# Altium PCB ArduinoShield.PcbDoc
Units mil, origin at the board's own origin, x right, y up, seen from the top; angles counter-clockwise.
Board outline 2698.82 x 2101.51 mil, 2 copper layers (Top Layer, Bottom Layer), stack 65.792 mil thick; 29 components, 14 nets, 102 pads, 5 vias.
Unrouted connection lines stored in the file: 11.
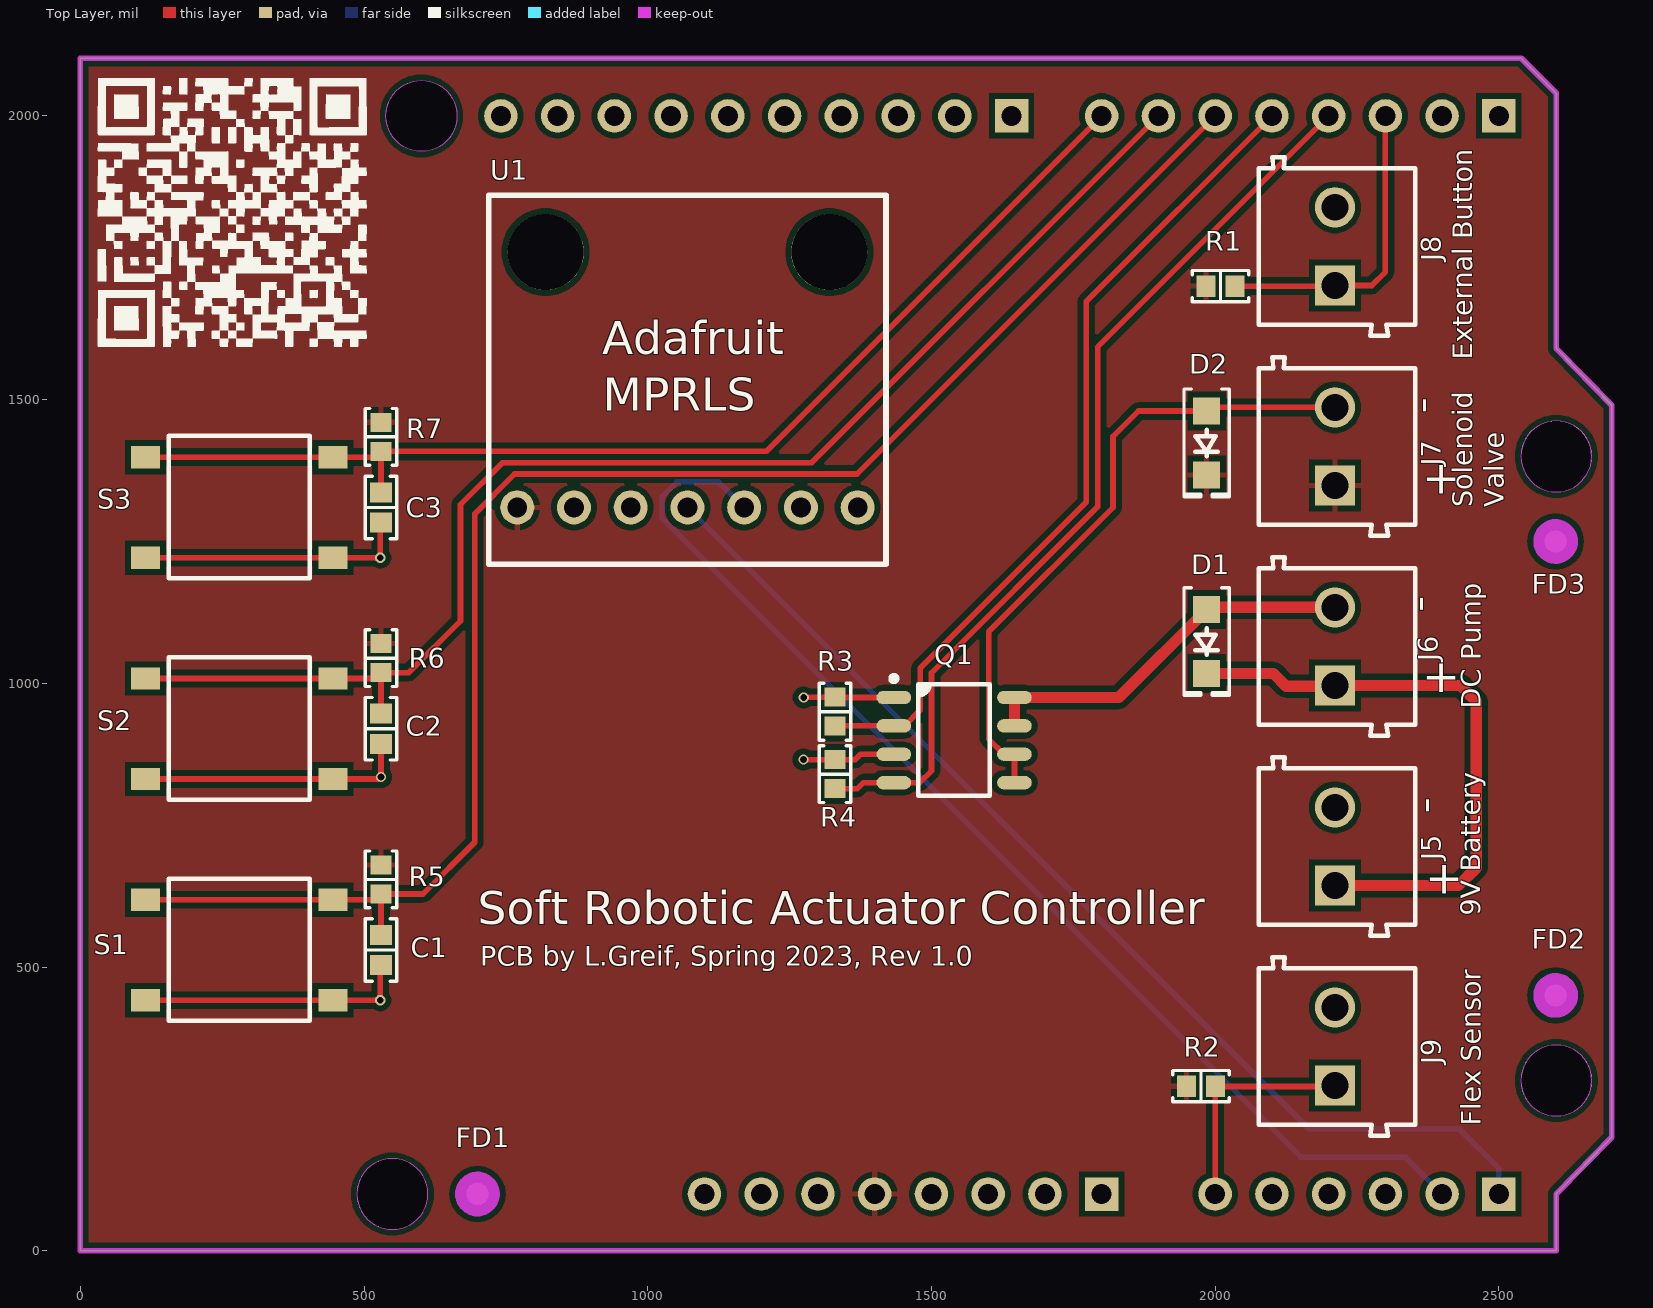
[diagram p0: Top Layer view]
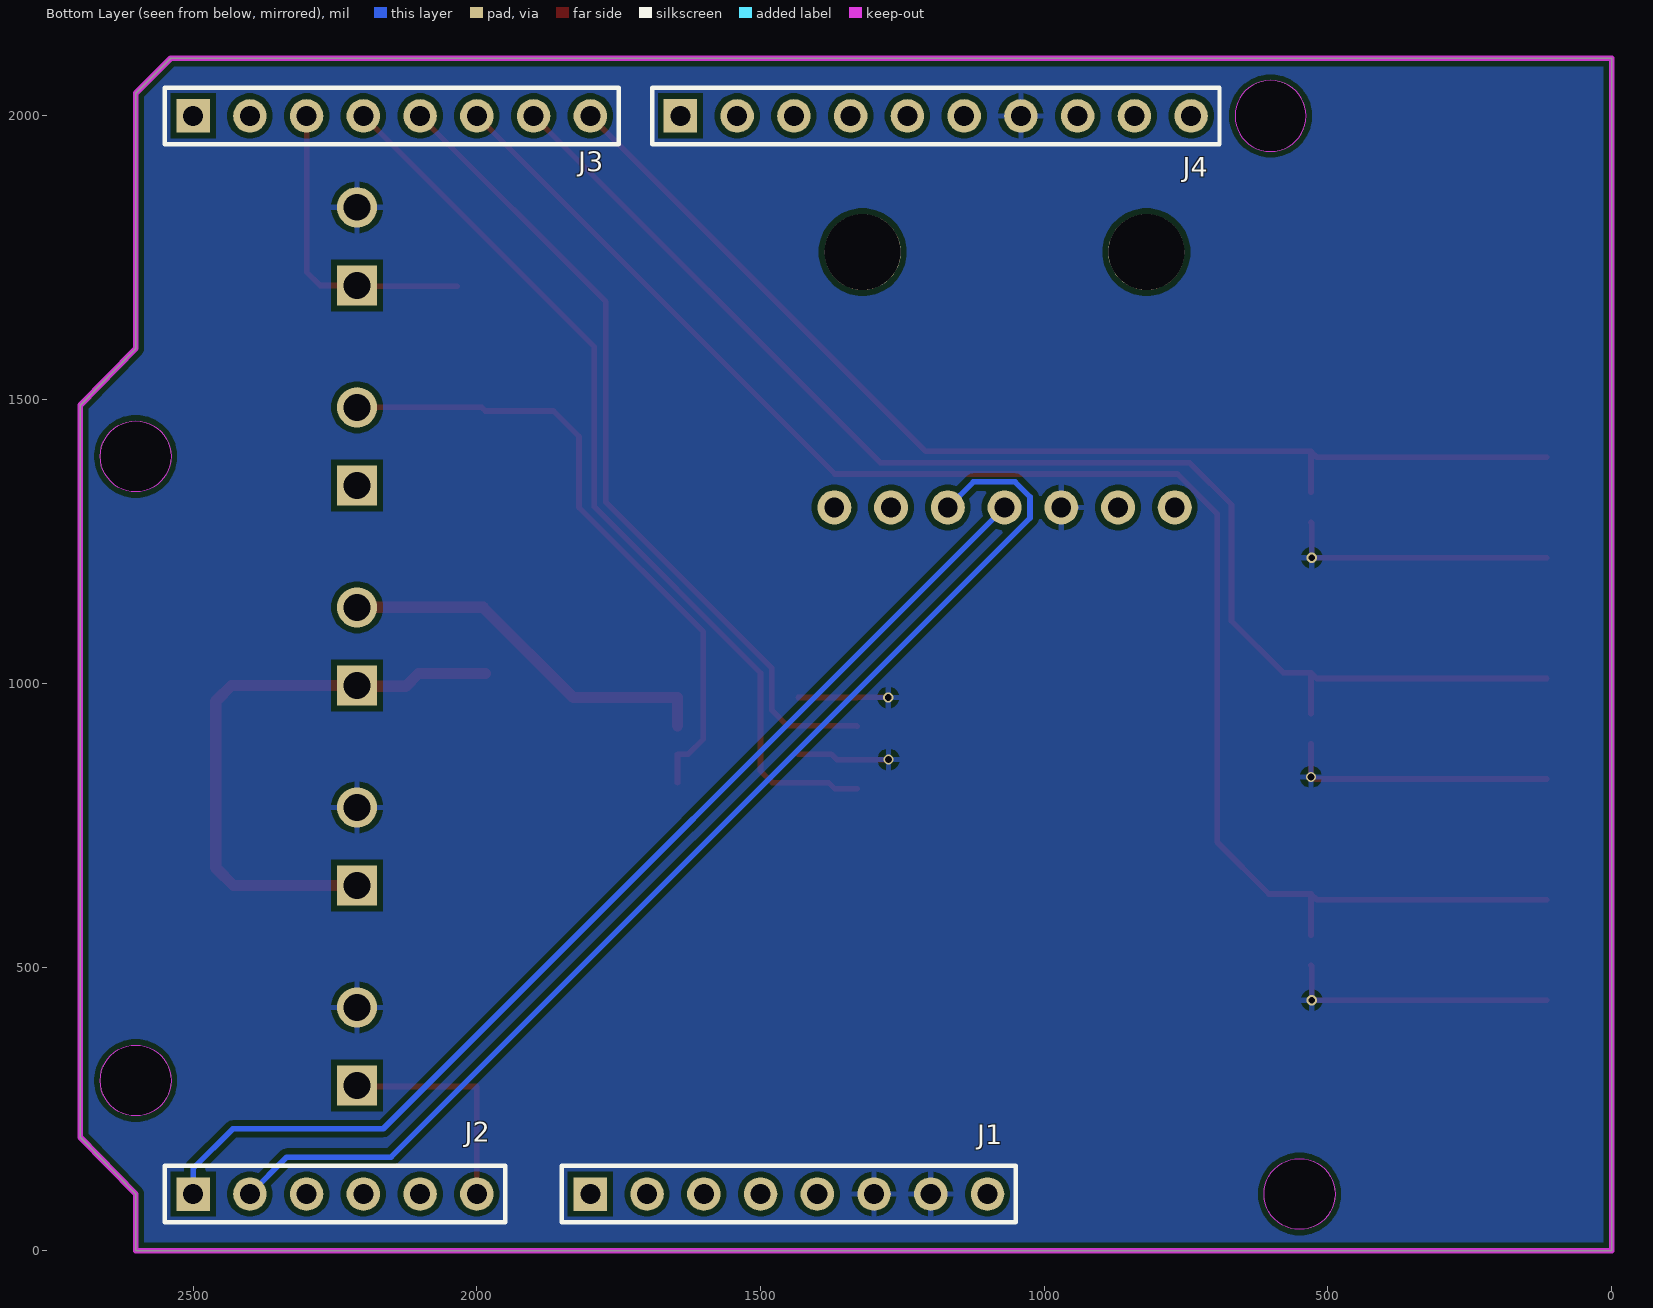
[diagram p1: Bottom Layer view, seen from below]
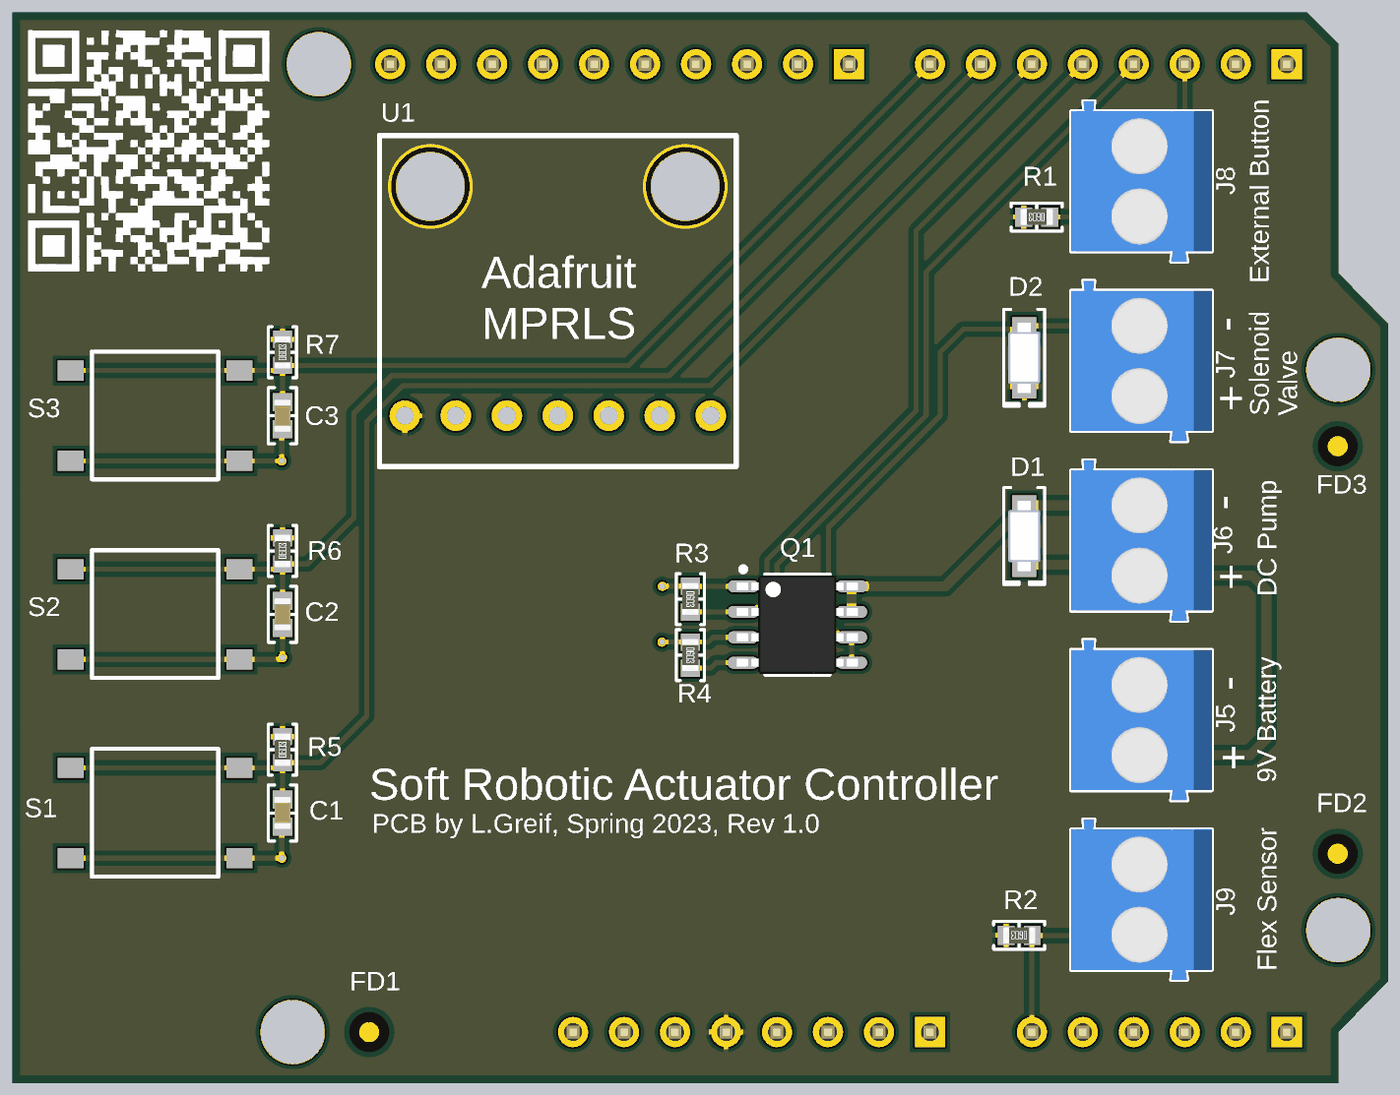
[diagram p2: 3D render of the assembled board from above, using the file's embedded part models]
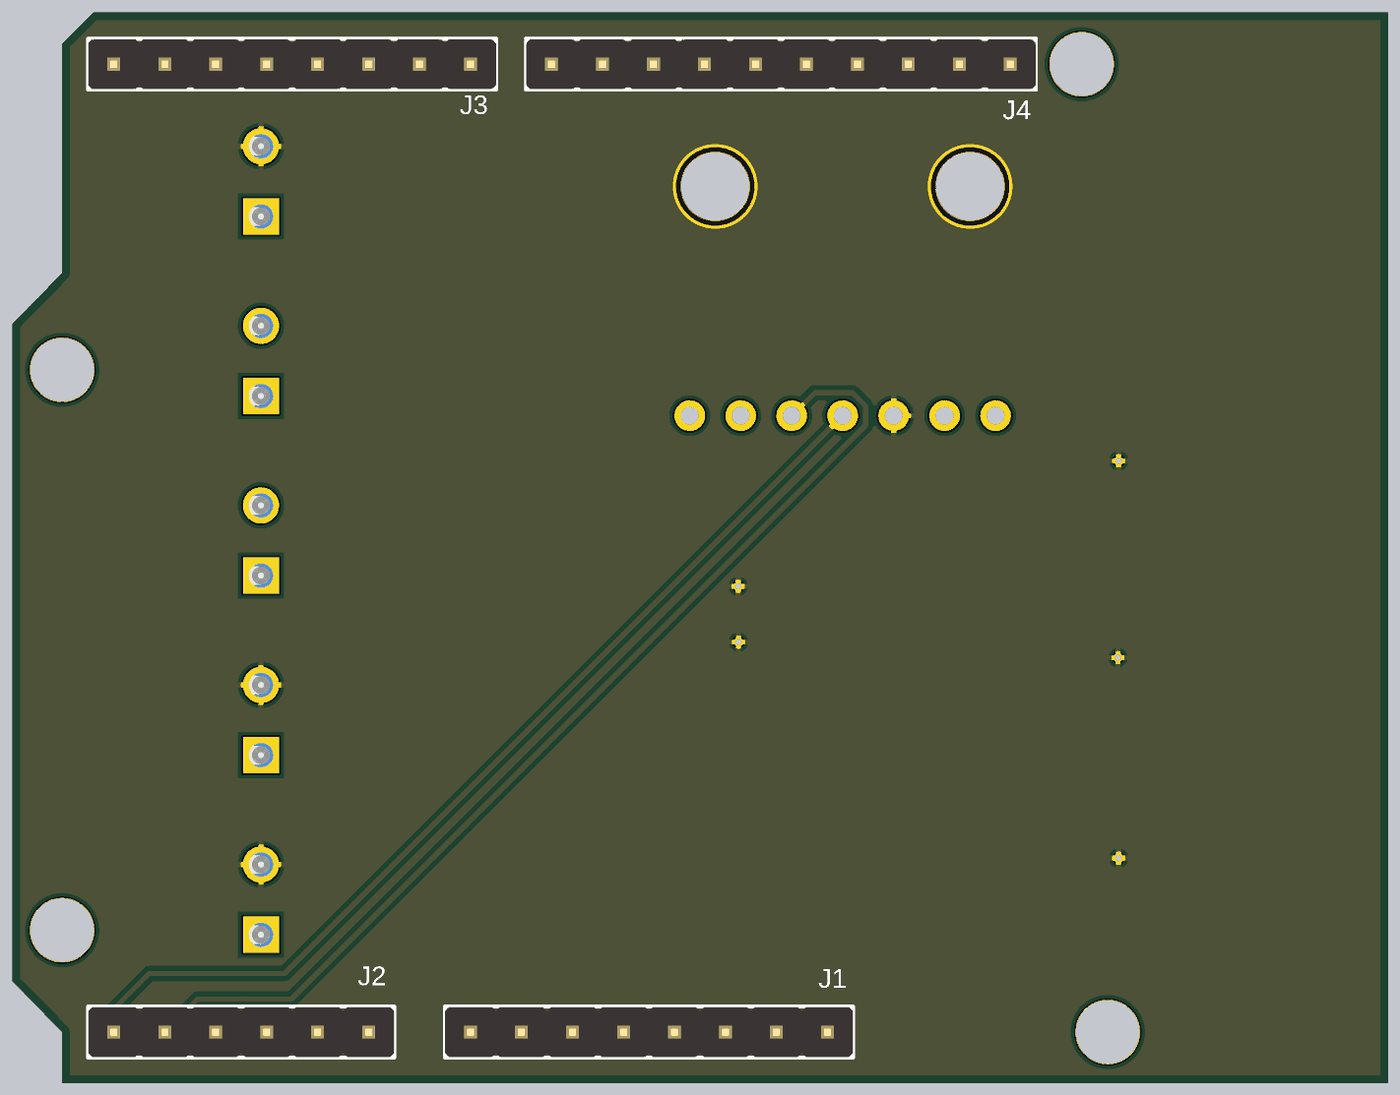
[diagram p3: 3D render of the assembled board from below, using the file's embedded part models]

## Layer stack, top to bottom
Top Solder: solder mask 0.4, Solder Resist, Dk 3.5
Top Layer: signal copper 1.4
Dielectric1: dielectric 62.9921, FR-4, Dk 4.8
Bottom Layer: signal copper 1.4
Bottom Solder: solder mask 0.4, Solder Resist, Dk 3.5

## Board outline
0,0 0,2101.51 2539.58,2101.51 2601.18,2039.91 2601.18,1590 2698.82,1490 2698.82,200 2601.18,100 2601.18,0
cut-out: 2538.68,1400 ccw(c2601.18,1400) 2601.18,1337.5 ccw(c2601.18,1400) 2663.68,1400 ccw(c2601.18,1400) 2601.18,1462.5 ccw(c2601.18,1400)
cut-out: 2538.68,300 ccw(c2601.18,300) 2601.18,237.5 ccw(c2601.18,300) 2663.68,300 ccw(c2601.18,300) 2601.18,362.5 ccw(c2601.18,300)
cut-out: 487.5,100 ccw(c550,100) 550,37.5 ccw(c550,100) 612.5,100 ccw(c550,100) 550,162.5 ccw(c550,100)
cut-out: 601.18,1937.5 cw(c601.18,2000) 538.68,2000 cw(c601.18,2000) 601.18,2062.5 cw(c601.18,2000) 663.68,2000 cw(c601.18,2000)

## Design rules (kind name [scope] priority, off if disabled: settings)
Clearance [All] p1: gap=10 ignorepadtopadclearanceinfootprint=FALSE except(0: Arc-Hole Track-Hole SMDPad-Hole THPad-Hole Via-Hole Fill-Hole Poly-Hole Region-Hole Text-Hole)
FabricationTestPointUsage TestPointUsage [All] p1: valid=0 allowmultiple=FALSE
FabricationTestpoint Testpoint [All] p1: side=3 testpointundercomponent=TRUE minsize=40 maxsize=100 preferedsize=60 minholesize=0 maxholesize=40 preferedholesize=32 testpointgrid=1 allowsidetop=TRUE allowsidebottom=TRUE usegrid=TRUE gridtolerance=0.01
HoleSize [All] p1: absolutevalues=TRUE maxlimit=500 minlimit=1 maxpercent=80.000 minpercent=20.000
PolygonConnect [All] p1: connectstyle=Relief reliefconductorwidth=10 reliefentries=4 polygonreliefangle="90 Angle" airgapwidth=10
RoutingVias [All] p1: holewidth=12 width=18 viastyle="Through Hole" minholewidth=12 minwidth=18 maxholewidth=12 maxwidth=18
SilkToSolderMaskClearance SilkscreenOverComponentPads [IsPad] p1: minsilkscreentomaskgap=10 clearancetoexposedcopper=TRUE
SolderMaskExpansion [All] p1: expansion=4 istentingtop=FALSE
Width [All] p1: maxlimit=100 minlimit=10 preferedwidth=10 minimp=50.000000 maximp=50.000000 favimp=50.000000
26 further rules are at their usual default settings.

## Components (designator, comment, footprint, x,y, rotation, side; value= is the part's Value field where it differs from the comment)
C1 "0.1 µF" "CAP 0603_1608" 530,530 r90 top
C2 "0.1 µF" "CAP 0603_1608" 530,920 r90 top
C3 "0.1 µF" "CAP 0603_1608" 530,1310 r90 top
D1 "1N4007FLTR" SOD123F 1985,1073.7 r270 top
D2 "1N4007FLTR" SOD123F 1985,1423.7 r270 top
FD1 "FID1X2R" FID1X2R 700,100 r0 top
FD2 "FID1X2R" FID1X2R 2600,450 r90 top
FD3 "FID1X2R" FID1X2R 2600,1250 r90 top
J1 "1396" "PCB - CONNECTOR - HEADER - MALE 1X8" 1800,100 r180 bottom locked
J2 "1395" "PCB - CONNECTOR - HEADER - MALE 1X6" 2500,100 r180 bottom locked
J3 "1396" "PCB - CONNECTOR - HEADER - MALE 1X8" 2500,2000 r180 bottom locked
J4 "1397" "PCB - CONNECTOR - HEADER - MALE 1X10" 1641.18,2000 r180 bottom locked
J5 "691103110002" 691103110002 2215,712.5 r90 top
J6 "691103110002" 691103110002 2215,1065 r90 top
J7 "691103110002" 691103110002 2215,1417.5 r90 top
J8 "691103110002" 691103110002 2215,1770 r90 top
J9 "691103110002" 691103110002 2215,360 r90 top
Q1 "IRF7301" IRF7301 1540,900 r0 top
R1 "10.0 kΩ" "PCB - RESISTOR - CHIP - RES 0603_1608" 2009.41,1700 r180 top
R2 "10.0 kΩ" "PCB - RESISTOR - CHIP - RES 0603_1608" 1975,290 r180 top
R3 "10.0 kΩ" "PCB - RESISTOR - CHIP - RES 0603_1608" 1330,950 r270 top
R4 "10.0 kΩ" "PCB - RESISTOR - CHIP - RES 0603_1608" 1330,840 r270 top
R5 "10.0 kΩ" "PCB - RESISTOR - CHIP - RES 0603_1608" 530,654.41 r90 top
R6 "10.0 kΩ" "PCB - RESISTOR - CHIP - RES 0603_1608" 530,1044.41 r90 top
R7 "10.0 kΩ" "PCB - RESISTOR - CHIP - RES 0603_1608" 530,1434.41 r90 top
S1 "SPST-NO" PTS641SK31SMTR2LFS 280,530 r180 top
S2 "SPST-NO" PTS641SK31SMTR2LFS 280,920 r180 top
S3 "SPST-NO" PTS641SK31SMTR2LFS 280,1310 r180 top
U1 "Adafriut MPRLS" ADAFRUITMPRLS 770,1310 r0 top

## Footprints (in the part's own frame and the unit in brackets; to place one, negate y for a bottom-side part, rotate by r counter-clockwise, add the part's x,y. Pads: shape width x height; smd on the part's side, far side on the other; paste and mask are expansions set on the pad)
691103110002 [mm] "3,50mm - modular - blue - Horizontal wire entry - Pressure clamp - 8,4mm height - 02p"
  rect 1.8x1.8 hole 1.2: 1(-1.75,0.1)
  round 1.8 hole 1.2: 2(1.75,0.1)
  silkscreen extent -4,-3.5 4,3.5, body extent -4,-3.5 4,3.5, height 8.45
ADAFRUITMPRLS [mil]
  round 60 hole 35: 1(0,0) 2(100,0) 3(200,0) 4(300,0) 5(400,0) 6(500,0) 7(600,0)
  round 134 hole 134 mask+16: 8(50,450) 9(550,450)
  silkscreen extent -50,-100 650,550
"CAP 0603_1608" [mm] "Chip Capacitor, 2-Leads, Body 1.60x0.80mm, IPC Medium Density"
  rect 0.9x1 smd: 1(-0.675,0) 2(0.675,0)
  silkscreen extent -1.4,-0.7 1.4,0.7, body extent -0.8,-0.41 0.8,0.41, height 0.82
FID1X2R [mm] "Fiducial - Round 1x2mm"
  round 1 smd paste-0.5 mask+0.5: 0(0,0)
  Top Layer keep-out circle w1: c0,0 r0.5
IRF7301 [mm] "SOP, 8-Leads, Body 4.90x3.90mm, Pitch 1.27mm, IPC Medium Density"
  oval 1.55x0.6 smd: 1(-2.7,1.905) 2(-2.7,0.635) 3(-2.7,-0.635) 4(-2.7,-1.905) 5(2.7,-1.905) 6(2.7,-0.635) 7(2.7,0.635) 8(2.7,1.905)
  silkscreen extent -2.82,-2.5 1.6,2.88, body extent -3.01,-2.45 3.01,2.45, height 1.5
"PCB - CONNECTOR - HEADER - MALE 1X6" [mm] "Connector; Header; 6 Position"
  rect 1.5x1.5 hole 0.9: 1(0,0)
  round 1.5 hole 0.9: 2(2.54,0) 3(5.08,0) 4(7.62,0) 5(10.16,0) 6(12.7,0)
  silkscreen extent -1.27,-1.27 13.97,1.27, body extent -1.27,-1.25 13.97,1.25, height 8.55
"PCB - CONNECTOR - HEADER - MALE 1X8" [mm] "Connector; Header; 8 Position"
  rect 1.5x1.5 hole 0.9: 1(0,0)
  round 1.5 hole 0.9: 2(2.54,0) 3(5.08,0) 4(7.62,0) 5(10.16,0) 6(12.7,0) 7(15.24,0) 8(17.78,0)
  silkscreen extent -1.27,-1.27 19.05,1.27, body extent -1.27,-1.25 19.05,1.25, height 8.55
"PCB - CONNECTOR - HEADER - MALE 1X10" [mm] "Connector; Header; 10 Position"
  rect 1.5x1.5 hole 0.9: 1(0,0)
  round 1.5 hole 0.9: 2(2.54,0) 3(5.08,0) 4(7.62,0) 5(10.16,0) 6(12.7,0) 7(15.24,0) 8(17.78,0) 9(20.32,0) 10(22.86,0)
  silkscreen extent -1.27,-1.27 24.13,1.27, body extent -1.27,-1.25 24.13,1.25, height 8.55
"PCB - RESISTOR - CHIP - RES 0603_1608" [mm] "Chip Resistor, 2-Leads, Body 1.60x0.80mm, IPC Medium Density"
  rect 0.85x0.95 smd: 1(-0.65,0) 2(0.65,0)
  silkscreen extent -1.27,-0.7 1.27,0.7, body extent -0.8,-0.4 0.8,0.4, height 0.45
PTS641SK31SMTR2LFS [mm] "SPST Push Button"
  rect 1.3x1 smd: 1(-4.2,2.25) 2(4.2,2.25) 3(-4.2,-2.25) 4(4.2,-2.25)
  silkscreen extent -3.15,-3.2 3.15,3.18, body extent -4.2,-3.31 4.2,3.31, height 3.1
SOD123F [mm] "SODFL, 2-Leads, Body 1.60x3.50mm, IPC Medium Density"
  rect 1.2x1.2 smd: 1(-1.43,0) 2(1.43,0)
  silkscreen extent -2.41,-1.02 2.41,1.02, body extent -1.75,-0.8 1.75,0.8, height 1.1

## Part data
C1 C2 C3: library part CS0603KRX7R7BB104, "CAP CER 0.1UF 16V X7R 0603", Device Package="0603 (1608 Metric)", Manufacturer=Yageo, Operating Temperature="-55°C ~ 125°C", Supplier Part Number 1=311-3560-1-ND, Temperature Coefficient=X7R, Tolerance=±10%, Voltage - Rated=16V, Applications="Boardflex Sensitive", Capacitance="0.1 µF", ComponentLink1Description=Datasheet, ComponentLink1URL=http://www.yageo.com/NewPortal/yageodocoutput?fileName=/pdf/MLCC/UPY-ST_NPOX7R_16V-to-3KV_5.pdf, ComponentLink2Description="DigiKey Link", ComponentLink2URL=https://www.digikey.com/en/products/detail/yageo/CS0603KRX7R7BB104/6097897, Features="Soft Termination", lastupdated="3/1/2023 8:07:52 PM", Lifecycle Status=Active, Minimum Order=1, Mounting Type="Surface Mount, MLCC", Package / Case="0603 (1608 Metric)", Packaging=TapeAndReel, Part Number=CS0603KRX7R7BB104, Part Status=Active, partid=2286, price=0.01, Series=CS, Size / Dimension="0.063\" L x 0.031\" W (1.60mm x 0.80mm)", Supplier 1=DigiKey, Thickness (Max)="0.037\" (0.95mm)"
D1 D2: "STANDARD RECTIFIER 1000V SOD-123", Capacitance @ Vr, F="15pF @ 4V, 1MHz", Current - Average Rectified (Io)=1A, Current - Reverse Leakage @ Vr="5µA @ 1000V", Manufacturer="SMC Diode Solutions", Package / Case=SOD-123F, Supplier Device Package=SOD-123FL, Supplier Part Number 1=1655-1N4007FLCT-ND, Voltage - DC Reverse (Vr) (Max)=1000V, Voltage - Forward (Vf) (Max) @ If="1.1V @ 1A", ComponentLink1Description=Datasheet, ComponentLink1URL=http://www.smc-diodes.com/propdf/1N4001FL-1N4007FL%20N1646%20REV.A.pdf, ComponentLink2Description="DigiKey Link", ComponentLink2URL=http://digikey.com/product-detail/en/smc-diode-solutions/1N4007FLTR/1655-1N4007FLCT-ND/11657827, Diode Type=Standard, lastupdated="8/30/2020 8:59:55 PM", Lifecycle Status=Active, Minimum Order=1, Mounting Type="Surface Mount", Packaging=TapeAndReel, Part Number=1N4007FLTR, partid=3314, price=0.01, Speed="Standard Recovery >500ns, > 200mA (Io)", Supplier 1=DigiKey
FD1 FD2 FD3: library part CMP-00028-00005-2, "Fiducial - Round 1x2mm", Pins=0
J1 J3: library part CMP-002-00088-1, "Connector Header Through Hole 8 position 0.100&quot; (2.54mm)", Current Rating="3.0 A", Manufacturer="Sullins Connector Solutions", Manufacturer part number=PRPC008SAAN-RC, Category=Headers, Connector Type="Header, Breakaway", Datasheet=https://media.digikey.com/PDF/Data%20Sheets/Sullins%20PDFs/xRxCzzzSxxN-RC_ST_11635-B.pdf, Male or Female=Male, Material=Gold, Mounting Angle=Straight, Number of Positions=8, Number of Rows=1, Rowan Part Number=1396, Status=Active
J2: library part CMP-002-00074-1, "Connector Header Through Hole 6 position 0.100&quot; (2.54mm)", Current Rating="3.0 A", Manufacturer="Sullins Connector Solutions", Manufacturer part number=PRPC006SAAN-RC, Category=Headers, Connector Type="Header, Breakaway", Datasheet=https://media.digikey.com/PDF/Data%20Sheets/Sullins%20PDFs/xRxCzzzSxxN-RC_ST_11635-B.pdf, Male or Female=Male, Material=Gold, Mounting Angle=Straight, Number of Positions=6, Number of Rows=1, Rowan Part Number=1395, Status=Active
J4: library part CMP-002-00075-1, "Connector Header Through Hole 10 position 0.100&quot; (2.54mm)", Current Rating="3.0 A", Manufacturer="Sullins Connector Solutions", Manufacturer part number=PRPC010SAAN-RC, Category=Headers, Connector Type="Header, Breakaway", Datasheet=https://media.digikey.com/PDF/Data%20Sheets/Sullins%20PDFs/xRxCzzzSxxN-RC_ST_11635-B.pdf, Male or Female=Male, Material=Gold, Mounting Angle=Straight, Number of Positions=10, Number of Rows=1, Rowan Part Number=1397, Status=Active
J5 J6 J7 J8 J9: library part CMP-1502-03254-1, "Series 1031 - 3.50 mm Horizontal Entry Modular with Pressure Clamp WR-TBL, 2 pin", Manufacturer="Wurth Elektronik", Operating Temperature=-40to105degC, Datasheet URL=http://katalog.we-online.de/em/datasheet/6911031100xx.pdf, Manufacturer URL=http://www.we-online.de, Mounting Technology=THT, Package Reference=691103110002, Packaging=Box, Part Number=691103110002, Pin Number=2, Pitch=3.50mm, Publisher=WurthElektronik
Q1: Supplier Part Number 1=IRF7301PBFCT-ND, Supplier 1=DigiKey
R1 R2 R3 R4 R5 R6 R7: library part 1416, "10 kOhms ±1% 0.1W, 1/10W Chip Resistor 0603 (1608 Metric) Moisture Resistant Thick Film", Manufacturer=Yageo, Manufacturer part number=RC0603FR-0710KL, Package="0603 (1608 Metric)", Power="100.0 mW", Supplier Part Number 1=311-10.0KHRTR-ND, Tolerance="1.0 %", Category=Fixed, Composition="Thick Film", Datasheet=https://www.yageo.com/upload/media/product/productsearch/datasheet/rchip/PYu-RC_Group_51_RoHS_L_11.pdf, Name="10.0 kΩ 100.0 mW 1.0 % Thick Film Resistor", Packaging="Tape & Reel (TR)", Resistance="10.0 kΩ", Rowan Part Number=1416, Status=Active, Supplier 1=Digi-Key
S1 S2 S3: library part PTS641SK31SMTR2LFS, Supplier Part Number 1=CKN10810CT-ND, Supplier 1=DigiKey
U1: library part AdafruitMPRLS, Supplier Part Number 1=1528-2713-ND, Supplier 1=DigiKey

## Free pads (board coordinates)
  round 125 hole 125: MH(550,100) MH(601.18,2000) MH(2601.18,300) MH(2601.18,1400)

## Via types
v1: diameter 18, hole 12, Top Layer to Bottom Layer, 5 vias

## Nets (pads, with @x,y where several pads share a name; then routed paths per layer and width w, separated by ;. In a path a pad name is that pad's centre, name@x,y a point inside that pad or via, vN(x,y) a via of type N, cw(c..) or ccw(c..) an arc to the next point about the centre after c; other vN are vias at no path point)
+5V: D2.2 J1.5 J7.1 R1.2 R2.2 R5.2 R6.2 R7.2 U1.1
+9: D1.2 J5.1 J6.1 | length 1051.6
  Top Layer w20: D1.2 2102.6,1017.4 2125,995 2209.96,995 J6.1 2432.43,996.1 2460,968.53 2460,675 2428.6,643.6 J5.1
AnalogFlexSensor: J2.6 J9.1 R2.1 | length 401.2
  Top Layer w10: J2.6 2000,289.41 2209.37,289.41 J9.1
BTN1: C1.2 J3.6 R5.1 S1.3 S1.4 | length 2868.8
  Top Layer w10: S1.4 S1.3 519.76,618.58 R5.1 ; C1.2 R5.1 ; J3.6 1368.82,1368.82 765.18,1368.82 695,1298.64 695,720 603.82,628.82 R5.1
BTN2: C2.2 J3.7 R6.1 S2.3 S2.4 | length 2388.3
  Top Layer w10: S2.4 S2.3 519.76,1008.58 R6.1 ; C2.2 R6.1 ; J3.7 1288.82,1388.82 743.82,1388.82 670,1315 670,1110 578.82,1018.82 R6.1
BTN3: C3.2 J3.8 R7.1 S3.3 S3.4 | length 2006.7
  Top Layer w10: S3.4 S3.3 519.76,1398.58 R7.1 ; C3.2 R7.1 ; J3.8 1208.82,1408.82 R7.1
EmergencyButton: J3.3 J8.1 R1.1 | length 550.4
  Top Layer w10: R1.1 2209.96,1700 J8.1 2276.1,1701.1 2300,1725 J3.3
GND: C1.1 C2.1 C3.1 J1.6 J1.7 J4.7 J5.2 J8.2 J9.2 Q1.1 Q1.3 R3.1 R4.1 S1.1 S1.2 S2.1 S2.2 S3.1 S3.2 U1.3 | length 1750.7
  Top Layer w10: S1.2 S1.1 v1(528.58,441.42) 528.58,502.01 C1.1 ; S2.2 S2.1 524.25,831.42 527.84,835 v1(530,835) C2.1 ; S3.2 S3.1 v1(528.58,1221.42) 528.58,1282.01 C3.1 ; v1(1274.41,865.59) R4.1 1365.59,865.59 1375,875 Q1.3 ; v1(1275,975) 1275.59,975.59 R3.1 1330.59,975 Q1.1
NetD1_1: D1.1 J6.2 Q1.7 Q1.8 | length 680.6
  Top Layer w20: Q1.7 Q1.8 1830,975 1988.9,1133.9 J6.2
NetD2_1: D2.1 J7.2 Q1.5 Q1.6 | length 1143
  Top Layer w10: Q1.5 Q1.6 1627.6,875 1600.79,901.81 1600.79,1090.79 1820,1310 1820,1435 1865,1480 D2.1 1991.4,1486.4 J7.2
PumpOut: J3.5 Q1.2 R3.2 | length 1465.9
  Top Layer w10: R3.2 1330.59,925 1452.4,925 1480,952.6 1480,1026.57 1772.81,1319.38 1772.81,1672.81 J3.5
SCL: J2.1 U1.4 | length 1957.6
  Bottom Layer w10: U1.4 2165,215 2430,215 2500,145 J2.1
SDA: J2.2 U1.5 | length 2080.3
  Bottom Layer w10: U1.5 1125,1355 1051.36,1355 1025,1328.64 1025,1291.36 2151.33,165.03 2334.97,165.03 J2.2
ValveOut: J3.4 Q1.4 R4.2 | length 1627.2
  Top Layer w10: R4.2 1369.41,814.41 1380,825 Q1.4 1479.21,825 1500,845.79 1500,1018.28 1792.81,1311.1 1792.81,1592.81 J3.4
pads on no net: FD1.0 FD2.0 FD3.0 J1.1 J1.2 J1.3 J1.4 J1.8 J2.3 J2.4 J2.5 J3.1 J3.2 J4.1 J4.2 J4.3 J4.4 J4.5 J4.6 J4.8 J4.9 J4.10 U1.2 U1.6 U1.7 U1.8 U1.9

## Polygon pours and split planes (outlines as drawn)
GND on Bottom Layer "NONET_L-01_P-001" (solid, pour order 0): 0,2101.51 2539.58,2101.51 2601.18,2039.91 2601.18,1587.64 2698.82,1490 2698.82,197.64 2601.18,100 2601.18,0 0,0
+5V on Top Layer "NONET_L-01_P-001" (solid, pour order 1): 0,2101.51 2539.58,2101.51 2601.18,2039.91 2601.18,1587.64 2698.82,1490 2698.82,197.64 2601.18,100 2601.18,0 0,0

## Keep-outs
Keep-Out Layer:
  the board outline again, w10

## Silkscreen, mask and mechanical layers (free items; w line width, h text height)
Top Overlay:
  drawing of 37 lines, arcs and shapes, not listed
  text "External Button" at 2464.39,1570 h60 r90
  text "-" at 2409.17,1475 h100 r90
  text "+" at 2365,1314.7 h100
  text "Solenoid" at 2464.36,1310 h60 r90
  text "Valve" at 2520.01,1309.99 h60 r90
  text "-" at 2404.17,1125 h100 r90
  text "+" at 2365,964.7 h100
  text "DC Pump" at 2479.36,955 h60 r90
  text "-" at 2414.17,770 h100 r90
  text "+" at 2370,609.7 h100
  text "9V Battery" at 2478.75,590 h60 r90
  text "Soft Robotic Actuator Controller" at 700,556.06 h100
  text "PCB by L.Greif, Spring 2023, Rev 1.0" at 705,491.25 h60
  text "Flex Sensor" at 2479.36,220 h60 r90
Mechanical 1:
  circle w0.5: c741.18,2000 r10
  circle w0.5: c841.18,2000 r10
  circle w0.5: c941.18,2000 r10
  circle w0.5: c1041.18,2000 r10
  circle w0.5: c1141.18,2000 r10
  circle w0.5: c1241.18,2000 r10
  circle w0.5: c1341.18,2000 r10
  circle w0.5: c1441.18,2000 r10
  circle w0.5: c1541.18,2000 r10
  circle w0.5: c1641.18,2000 r10
  circle w0.5: c1800,2000 r10
  circle w0.5: c1900,2000 r10
  circle w0.5: c2000,2000 r10
  circle w0.5: c2100,2000 r10
  circle w0.5: c2200,2000 r10
  circle w0.5: c2300,2000 r10
  circle w0.5: c2400,2000 r10
  circle w0.5: c2500,2000 r10
  circle w0.5: c1100,100 r10
  circle w0.5: c1200,100 r10
  circle w0.5: c1300,100 r10
  circle w0.5: c1400,100 r10
  circle w0.5: c1500,100 r10
  circle w0.5: c1600,100 r10
  circle w0.5: c1700,100 r10
  circle w0.5: c1800,100 r10
  circle w0.5: c2000,100 r10
  circle w0.5: c2100,100 r10
  circle w0.5: c2200,100 r10
  circle w0.5: c2300,100 r10
  circle w0.5: c2400,100 r10
  circle w0.5: c2500,100 r10
  circle w0.5: c550,100 r62.5
  circle w0.5: c2601.18,300 r62.5
  circle w0.5: c2601.18,1400 r62.5
  circle w0.5: c601.18,2000 r62.5
Mechanical 16:
  lines w5: -3720,-1350 -3520,-1350 ; -3720,550 -3520,550 ; -3720,2450 -3520,2450 ; -845,-3250 -845,-3050 ; -845,4150 -845,4350 ; 1680,-3050 3080,-3050 ; 2030,-3250 2030,-3050 ; 2030,4150 2030,4350 ; 3080,-2750 7580,-2750 ; 3080,-2450 7580,-2450 ; 3080,-2150 4580,-2150 ; 4580,-3050 4580,-2450 4580,-1850 ; 4905,-3250 4905,-3050 ; 4905,4150 4905,4350 ; 6680,-3050 6680,-2450 ; 7580,-1350 7780,-1350 ; 7580,550 7780,550 ; 7580,2450 7780,2450 ; 3080,-3050 7580,-3050 ; 3080,-3050 3080,-1850 4580,-1850 ; 4580,-1850 7580,-1850 7580,-3050 ; 7580,-3050 -3520,-3050 -3520,4150 7580,4150 7580,-3050 ; -3720,-3250 7780,-3250 7780,4350 -3720,4350 -3720,-3250
  text "1" at -2293,4215 h70
  text "2" at 567,4215 h70
  text "3" at 3447,4215 h70
  text "4" at 6317,4215 h70
  text "A" at -3645,3309 h70
  text "A" at 7655,3309 h70
  text "B" at -3645,1417 h70
  text "B" at 7655,1417 h70
  text "C" at -3645,-493 h70
  text "C" at 7655,-493 h70
  text "ENGINEER:" at 3130,-1950 h45
  text "TITLE:" at 4630,-1950 h45
  text "Logan Greif" at 3180,-2070 h70
  text "Soft Robotic Actuator Controller Shield for Arduino Uno R3" at 4680,-2070 h70
  text "PCB DESIGNER:" at 3130,-2245 h45
  text "Logan Greif" at 3180,-2370 h70
  text "D" at -3645,-2383 h70
  text "D" at 7655,-2383 h70
  text "DATE:" at 3130,-2550 h45
  text "PART NO.:" at 4630,-2550 h45
  text "REV:" at 6730,-2550 h45
  text ".PRINT_DATE" at 3180,-2670 h70
  text ".VersionControl_RevNumberShort" at 6780,-2670 h70
  text "FILE NAME:" at 3130,-2850 h45
  text "DWG NO:" at 4630,-2850 h45
  text "SCALE:" at 6730,-2850 h45
  text ".PCB_FILE_NAME_NO_PATH" at 3180,-2970 h70
  text "1" at -2293,-3185 h70
  text "2" at 567,-3185 h70
  text "3" at 3447,-3185 h70
  text "4" at 6317,-3185 h70

## Text inside footprints (layer, text, board x,y; h text height)
U1: Top Overlay "MPRLS" at 920.31,1461.06 h100; Top Overlay "Adafruit" at 920.26,1561.02 h100